# Altium PCB PCB1.pcbdoc (part 2 of 2)
Units mil, origin at the board's own origin, x right, y up, seen from the top; angles counter-clockwise.
Board outline 3910 x 3132 mil, 4 copper layers (Top Layer, Inner1, Inner2, Bottom Layer); 109 components, 89 nets, 472 pads, 360 vias.
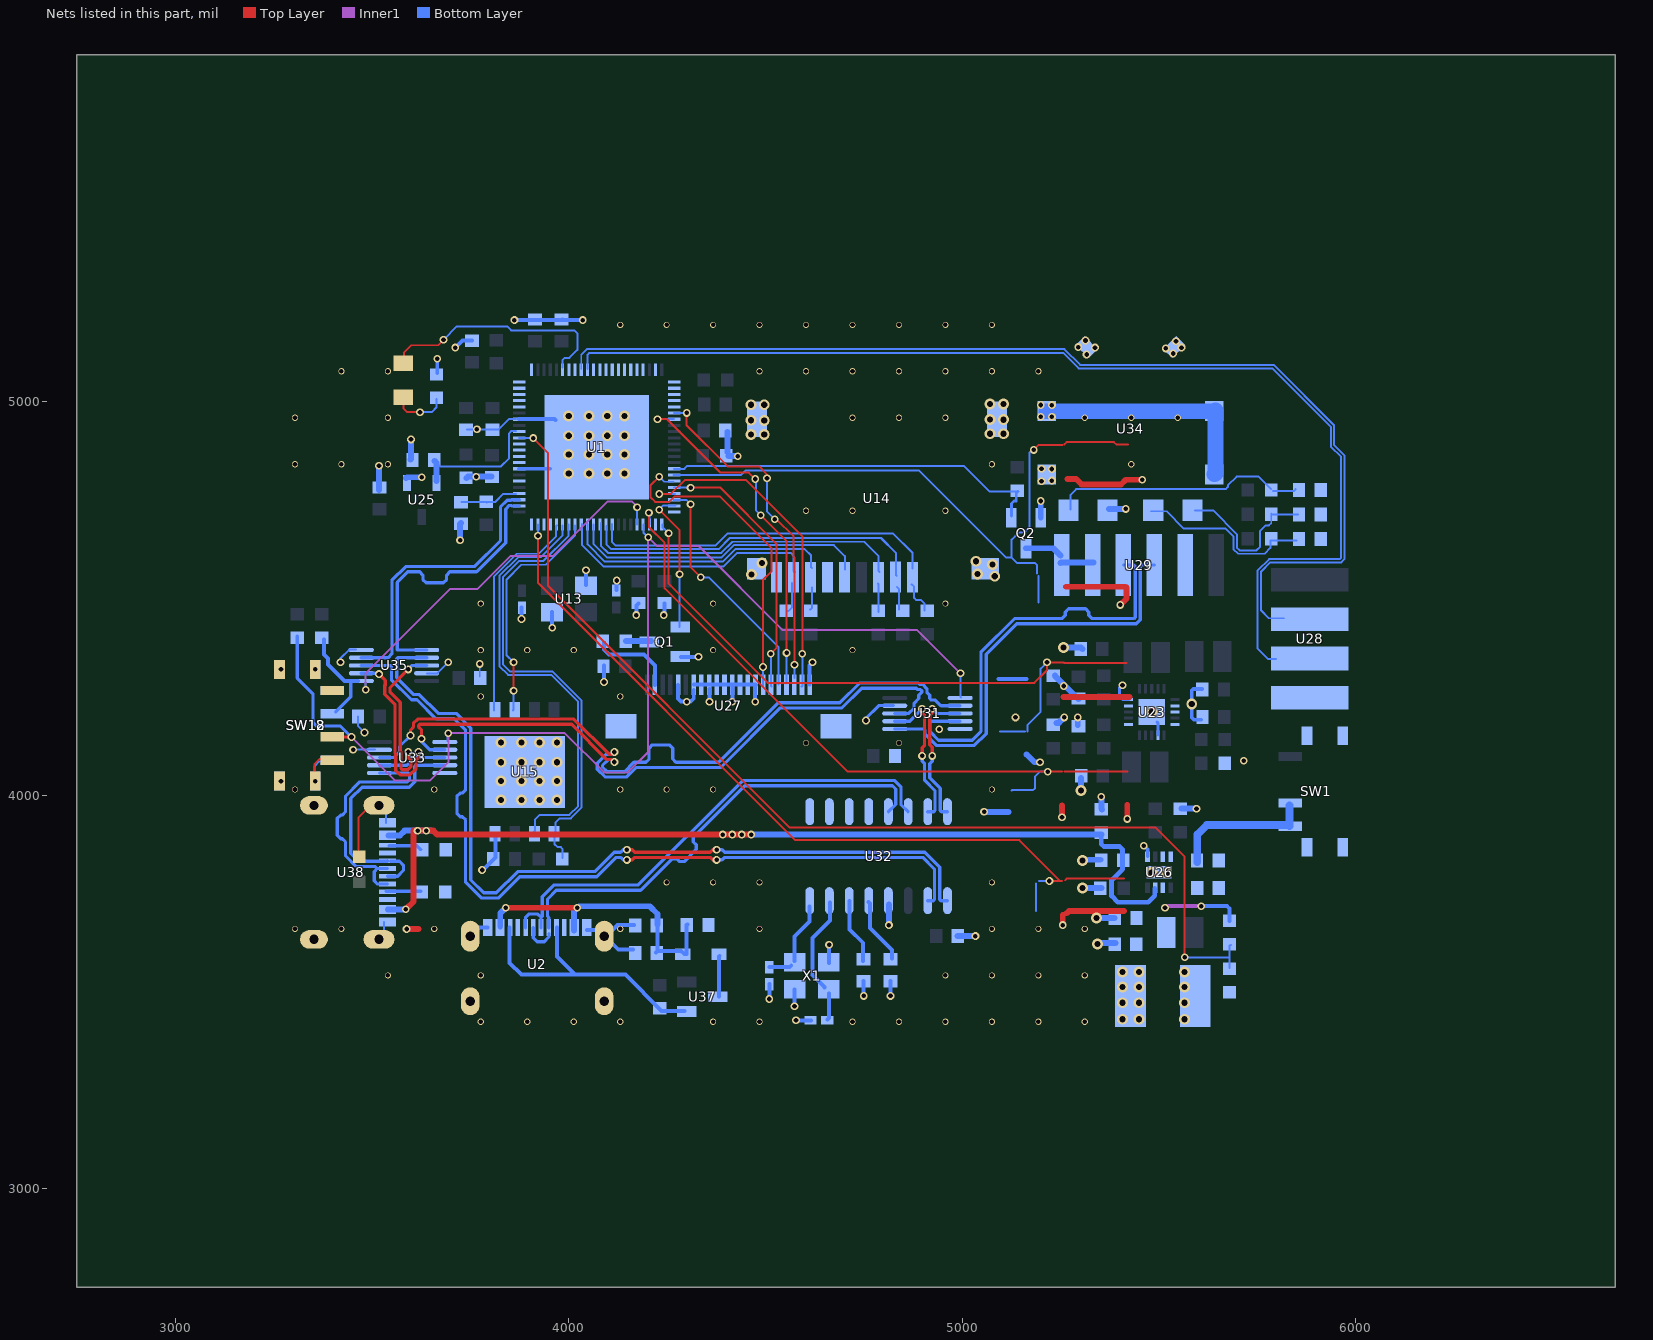
[diagram p4: the nets of this part, all layers, seen from the top]

## Via types
v1: diameter 19.7, hole 11.8, Top Layer to Bottom Layer, 200 vias
v2: diameter 15.67, hole 11.81, Top Layer to Bottom Layer, 82 vias
v3: diameter 27.56, hole 15.75, Top Layer to Bottom Layer, 77 vias
v4: diameter 15.7, hole 11.8, Top Layer to Bottom Layer, 1 vias

## Nets (pads, with @x,y where several pads share a name; then routed paths per layer and width w, separated by ;. In a path a pad name is that pad's centre, name@x,y a point inside that pad or via, vN(x,y) a via of type N, cw(c..) or ccw(c..) an arc to the next point about the centre after c; other vN are vias at no path point) (continued)
$1N24692: Q2.3 U29.1 U29.2 | length 180.3
  Bottom Layer w15: Q2.3@5162,4628 5232,4628 U29.1@5250,4610 ; U29.1@5250,4590 5252,4592 U29.2@5334,4592
$1N27196: R37.2 U27.2 | length 214.6
  Bottom Layer w10: R37.2@4090,4388 4090,4370 4102,4358 4192,4358 4220,4330 U27.2@4220,4280
$1N27198: Q1.3 R37.1 | length 64
  Bottom Layer w15: R37.1@4146,4392 Q1.3@4210,4392
$1N41778: LED3.2 R44.1 | length 143.1
  Top Layer w5: LED3.2@3580,5012 3580,4984 3590,4974 v1(3622,4974)
  Bottom Layer w5: v1(3622,4974) 3652,4974 3664,4986 R44.1@3664,5008
$1N41848: C42.2 C43.2 L4.2 R50.2 U26.6 U30.2 | length 200.1
  Inner1 w10: v1(5516,3714) 5520,3718 v1(5608,3718)
  Bottom Layer w10: v1(5608,3718) 5674,3718 5680,3712 R50.2@5680,3680
  other v3: 5407.8,3430.81 5449.8,3430.81 5407.8,3472.81 5449.8,3472.81 5407.8,3512.81 5449.8,3512.81 5407.8,3550.81 5449.8,3550.81
$1N82039: C57.2 U32.16 X1.3 | length 211.4
  Bottom Layer w10: C57.2@4509.89,3563.16 4561.89,3563.16 X1.3@4565.89,3567.16 ; X1.3@4573.89,3579.16 4573.89,3641.16 4611.89,3679.16 U32.16@4611.89,3717.16
$1N82041: C58.2 U32.15 X1.1 | length 314.3
  Bottom Layer w10: X1.1@4649.89,3511.16 4649.89,3513.16 4619.89,3543.16 4619.89,3637.16 4663.89,3681.16 U32.15@4663.89,3727.16 ; C58.2@4658,3430 4662,3434 X1.1@4662,3496
$1N82056: C59.2 U32.14 | length 166.1
  Bottom Layer w10: U32.14@4713.89,3731.16 4713.89,3659.16 4747.89,3625.16 C59.2@4747.89,3579.16
$1N82057: C60.2 U32.13 | length 168.9
  Bottom Layer w10: U32.13@4761.89,3729.16 4765.89,3725.16 4765.89,3663.16 4821.89,3607.16 C60.2@4821.89,3585.16
$1N82921: D1.2 U37.3 | length 104.8
  Bottom Layer w10: U37.3@4382,3488 4382,3590 D1.2@4384,3592
$1N83812: R62.2 U38.10 | length 84.1
  Bottom Layer w8.3: U38.10@3544,3872 3614,3872 R62.2@3624,3862
$1N83813: R61.2 U38.4 | length 88
  Bottom Layer w8.3: U38.4@3536,3756 R61.2@3624,3756
$1N84485: C45.2 C46.2 SW1.2 SW1.3 U26.3 U26.4 | length 363.9
  Bottom Layer w20: C46.2@5598,3830 5598,3900 5622,3924 SW1.3@5830,3924 ; SW1.3@5832,3922 SW1.2@5832,3974
ADC0: R50.1 R51.2 U1.79 | length 2764.5
  Top Layer w5: v1(3910,4908) 3948,4870 3948,4532 4562,3918 5492,3918 5566,3844 v1(5566,3588)
  Bottom Layer w5: U1.79@3874,4908 v1(3910,4908) ; v1(5566,3588) 5679.8,3588 ; R51.2@5679.8,3560.81 5679.8,3588 ; R50.1@5679.8,3618.81 R50.1@5679.8,3615.8 ; R50.1@5684,3620 R50.1@5679.8,3615.8 ; 5679.8,3588 R50.1@5679.8,3615.8
AVCC_3V0: C1.2 U1.80 U25.2 | length 337.3
  Bottom Layer w5: C1.2@3662,4848 3674,4836 3828,4836 3848,4856 3848,4900 3847.75,4900.25 3847.75,4919.56 3854.19,4926 U1.80@3866,4926
  Bottom Layer w15: C1.2@3659.22,4850.07 3664.06,4845.23 U25.2@3664.06,4798.59
CAM_EN: Q2.1 R56.1 U1.37 | length 977.2
  Bottom Layer w5: U1.37@4268,4830 4294,4830 4301.46,4837.46 5004.54,4837.46 5070,4772 5140,4772 R56.1@5142,4774
  Bottom Layer w7: Q2.1@5126,4710 5126,4742 5132,4748 5138,4748 5138,4768 R56.1@5142,4772
CAM_N: U29.4 U31.6 | length 1071.2
  Bottom Layer w8.3: U31.6@4828.93,4168.63 4902.42,4168.63 4905.35,4165.7 4905.35,4156.04 4934.69,4126.7 5031.51,4126.7 5061.3,4156.49 5061.3,4358.49 5138.81,4436 5442.81,4436 5453.3,4446.49 5453.3,4582.45 5456.23,4585.38 U29.4@5489.14,4585.38
CAM_P: U29.3 U31.4 | length 1070.5
  Bottom Layer w8.3: U31.4@4995.07,4188.31 4921.58,4188.31 4918.65,4185.38 4918.65,4161.55 4940.2,4140 5026,4140 5048,4162 5048,4364 5133.3,4449.3 5254,4449.3 5262.3,4457.6 5262.3,4465.7 5270.6,4474 5314,4474 5322.3,4465.7 5322.3,4457.6 5330.6,4449.3 5437.3,4449.3 5440,4452 5440,4582.45 5437.07,4585.38 U29.3@5410.4,4585.38
EC_A: C69.2 R52.1 U34.A | length 400.2
  Bottom Layer w5: U34.A@5592,4724 5638,4724 5698.5,4663.5 5698.5,4629.52 5705.52,4622.5 5748.5,4622.5 5758,4632 5758,4672 5772,4686 5780,4686 5786,4692 R52.1@5786,4714 ; R52.1@5786,4716 R52.1@5786,4714 ; C69.2@5854,4714 R52.1@5786,4714
EC_B: C68.2 R53.1 U34.B | length 642.3
  Bottom Layer w5: U34.B@5276,4726 5276,4764 5290,4778 5670,4778 5676,4784 5676,4788 5698,4810 5754,4810 R53.1@5786,4778 ; R53.1@5790,4774 5844,4774 C68.2@5848,4778
EC_KEY: C67.2 R54.1 U34.S | length 458.7
  Bottom Layer w5: U34.S@5480,4722 5520,4722 5564,4678 5670,4678 5690,4658 5690,4626 5702,4614 5769.08,4614 5784,4628.92 5784,4648 C67.2@5850,4648
GND: C1.1 C2.1 C9.2 C10.1 C12.1 C13.2 C14.2 C15.2 C20.2 C21.1 C22.2 C32.2 C33.2 C34.2 C35.2 C36.2 C37.2 C38.1 C39.1 C40.2 C42.1 C43.1 C44.1 C45.1 C46.1 C47.1 C48.1 C56.2 C57.1 C58.1 C59.1 C60.1 C61.2 C62.2 C64.2 C65.2 C66.2 C67.1 C68.1 C69.1 C70.1 LED1.1 Q1.2 Q2.2 R2.1 R4.1 R6.1 R24.2 R25.1 R31.2 R32.1 R34.1 R44.2 R51.1 R61.1 R62.1 SW1.4 SW12.3 SW12.4 SW18.1 SW18.4 U1.74 U1.82 U1.89 U2.1 U2.12 U2.13 U2.14 U13.2 U13.4 U14.6 U14.9 U14.10 U14.11 U14.12 U14.13 U15.4 U15.9 U23.1 U23.4 U23.5 U23.12 U23.13 U23.15 U23.17 U23.21 U25.1 U26.1 U26.9 U27.5 U27.7 U27.8 U27.9 U27.10 U27.11 U27.12 U27.13 U27.14 U27.15 U27.22 U27.23 U27.24 U28.1 U30.1 U31.5 U31.9 U32.12 U33.5 U33.9 U34.1 U34.2 U34.3 U34.4 U34.5 U34.6 U34.C U35.5 U35.9 U38.1 U38.12 U38.13 U38.14 X1.2 X1.4 | length 5352.2
  Top Layer w5: SW12.4@3356,4054 3354,4056 3354,4080 3366,4092 SW12.3@3384,4092 ; LED1.1@3466,3844 3466,3944 U38.14@3494,3972 ; v1(3694,4338) v1@3698,4338
  Top Layer w10: v1@4576,3428 v1(4578,3428)
  Top Layer w15: v1(3588,3660) 3618,3660 ; v1(5254,3944) 5254,3974 ; v1(5256,3670) 5256,3696 ; 5258,4250 5426,4250 ; 5264,4530 5416,4530 5418,4528 5418,4500 v1(5402,4484) ; 5266,3700 5272,3706 5412,3706 ; 5268,4804 5290,4804 5304,4790 5404,4790 5416,4802 v1(5458,4802) ; v1(5294,4198) v1@5294,4200 ; v1(5420,3940) 5420,3976
  Bottom Layer w5: SW18.4@3354,4038 3354,4074 3366,4086 SW18.1@3390,4086 ; v1(3420,4338) 3420,4348 3442,4370 U35.5@3460,4370 ; v1(3452,4116) U33.9@3508,4116 ; C61.2@3464,4200 3464,4176.49 v1(3480.97,4159.52) ; U38.1@3530,3678 3530,3646 U38.13@3532,3644 ; U38.14@3530,3970 3536,3964 U38.12@3536,3930 ; U35.9@3640,4310 3666,4310 v1(3694,4338) ; C13.2@3742,4930 3821.75,4930 3847.75,4956 U1.82@3866,4956 ; C62.2@3774,4302 v1(3774,4334)
  Bottom Layer w8: v1(4756,4190) 4756,4196 4788,4228 U31.9@4826,4228 ; v1(5408,4280) 5400,4272 5400,4252 5408,4244 U23.5@5424,4244 ; U23.21@5496,4186 5498,4184 U23.17@5498,4154
  Bottom Layer w10: R44.2@3666,5074 v1(3666,5110) ; v1(3712,5138) 3730,5156 C22.2@3754,5156 ; U2.14@3760,3660 3764,3664 U2.12@3794,3664 ; v1(3780,3810) 3782,3810 3814,3842 U15.4@3814,3900 ; v1(3862,5208) C21.1@3982,5208 ; U1.74@3874,4830 U1.89@3952,4830 ; U1.82@3874,4956 3964,4956 U1.89@3966,4954 ; v1(3880,4448) C9.2@3880,4478 ; v1(3958,4426) U13.2@3958,4466 ; C21.1@3984,5210 C21.1@3982,5208 ; v1(4036,5208) C21.1@3982,5208 ; U13.4@4044,4534 v1(4044,4572) ; U2.1@4046,3658 4088,3658 U2.13@4090,3656 ; v1(4090,4288) C47.1@4090,4330 ; U2.13@4098,3644 4124,3670 C64.2@4166,3670 ; U2.13@4100,3634 4126,3608 C65.2@4164,3608 ; C10.1@4122,4522 v1(4122,4546) ; v1(4172,4458) 4172,4482 C39.1@4178,4488 ; v1(4242,4458) 4244,4460 C38.1@4244,4488 ; U27.5@4278,4280 4278,4246 4286,4238 v1(4300,4238) 4310,4238 4318,4246 U27.7@4318,4268 ; Q1.2@4286,4352 v1(4330,4352) ; U27.7@4318,4282 U27.15@4474,4282 ; v1(4358,4238) U27.9@4358,4270 ; v1(4416,4238) U27.12@4416,4276 ; v1(4474,4238) U27.15@4474,4282 ; U27.15@4476,4280 U27.15@4474,4282 ; v1(4510,3482) C57.1@4510,3520 ; v1(4574,3464) X1.2@4574,3506 ; v1(4578,3428) C58.1@4616,3428 ; U27.22@4612,4282 4612,4330 v1(4620,4338) ; X1.4@4662,3574 v1(4662,3620) ; v1(4750,3490) C59.1@4750,3528 ; v1(4818,3490) C60.1@4818,3528 ; v1(5462,3872) 5472,3862 U26.1@5472,3846 ; C32.2@5608,4192 5590,4192 5584,4198 v3(5584,4232) 5584,4266 5588,4270 C33.2@5610,4270
  Bottom Layer w15: C2.1@3518,4776 v1(3518,4838) ; U25.1@3586,4806 3588.53,4808.53 v1(3626.66,4808.53) ; C1.1@3598,4854 3599.29,4855.29 v1(3599.29,4904.72) ; v1(3724,4648) 3724,4690 C48.1@3726,4692 ; R25.1@3740,4806 3744,4810 C15.2@3804,4810 ; R24.2@4404,4872 C12.1@4404,4924 ; R24.2@4406,4862 v1(4430,4862) ; v1(4814,3670) U32.12@4814,3722 ; C70.1@4988,3642 v1(5034,3642) ; v1(5056,3958) 5118,3958 ; 5164,4104 5184,4084 v1(5198,4084) ; Q2.2@5200,4706 v1(5200,4748) ; R4.1@5236,4304 C34.2@5296,4244 ; R2.1@5240,4184 5246,4184 v1(5260,4198) ; v1(5254,3944) v1@5254,3946 ; v3(5258,4376) 5302,4376 C35.2@5306,4372 ; C37.2@5294,4178 v1(5294,4198) ; v3(5302,4012) C36.2@5302,4044 ; v3(5306,3764) R31.2@5354,3764 ; v3(5306,3834) 5308,3836 C44.1@5352,3836 ; v3(5342,3688) C42.1@5388,3688 ; v3(5344,3622) 5346,3624 C43.1@5390,3624 ; v1(5354,3996) 5354,3966 R32.1@5356,3964 ; U34.C@5374,4728 v1(5416,4728) ; R34.1@5558,3966 v1(5596,3966)
  Bottom Layer w40: U34.2@5214,4976 U34.5@5638,4976 ; U34.6@5642,4816 5644,4818 U34.5@5644,4978
  other v1: 3268.75,4035.28 3355.62,4035.28 5716,4088 4942,4168 5136,4198 5258.31,4277.65 3268.75,4320.72 3355.62,4320.72 5202,4798 5228.39,4799.92 3765.17,4809.86 5202,4830 5228.39,4829.56 3766.68,4930.19 5200,4962 5228.39,4962.1 5200,4992 5228.39,4991.89 5316.65,5120.38 5536.57,5122.88 5518,5136 5338,5138 5558,5138 5295.37,5139.25 5544,5154 5314,5156
  other v2: 3776.61,3424.18 3894.72,3424.18 4012.83,3424.18 4130.94,3424.18 4367.16,3424.18 4485.27,3424.18 4721.49,3424.18 4839.6,3424.18 4957.71,3424.18 5075.82,3424.18 5193.93,3424.18 5312.04,3424.18 3540.39,3542.29 3776.61,3542.29 4957.71,3542.29 5075.82,3542.29 5193.93,3542.29 5312.04,3542.29 3304.17,3660.4 3422.28,3660.4 3658.5,3660.4 4130.94,3660.4 4485.27,3660.4 5075.82,3660.4 5193.93,3660.4 5312.04,3660.4 4249.05,3778.51 4367.16,3778.51 4485.27,3778.51 5075.82,3778.51 3304.17,4014.73 3658.5,4014.73 4130.94,4014.73 4249.05,4014.73 4367.16,4014.73 5075.82,4014.73 4603.38,4132.84 4839.6,4132.84 3776.61,4250.95 4130.94,4250.95 3776.61,4369.06 3894.72,4369.06 4012.83,4369.06 4367.16,4369.06 4721.49,4369.06 3776.61,4487.17 4367.16,4487.17 4957.71,4487.17 4603.38,4723.39 4721.49,4723.39 4957.71,4723.39 3304.17,4841.5 3422.28,4841.5 3540.39,4841.5 5075.82,4841.5 5430.15,4841.5 3304.17,4959.61 3540.39,4959.61 4721.49,4959.61 4839.6,4959.61 4957.71,4959.61 5312.04,4959.61 5430.15,4959.61 5548.26,4959.61 3422.28,5077.72 3540.39,5077.72 4485.27,5077.72 4603.38,5077.72 4721.49,5077.72 4839.6,5077.72 4957.71,5077.72 5075.82,5077.72 5193.93,5077.72 4130.94,5195.83 4249.05,5195.83 4367.16,5195.83 4485.27,5195.83 4603.38,5195.83 4721.49,5195.83 4839.6,5195.83 4957.71,5195.83 5075.82,5195.83
  other v3: 5565.8,3430.81 5565.8,3472.81 5565.8,3512.81 5565.8,3550.81 5482.27,3804.01 5520.43,3804.01 3828,3987.95 3880,3987.95 3926,3987.95 3970,3987.95 3828,4035.95 3880,4035.95 3926,4035.95 3970,4035.95 3828,4083.95 3880,4083.95 3926,4083.95 3970,4083.95 3828,4133.95 3880,4133.95 3926,4133.95 3970,4133.95 5482.3,4211.71 5083.13,4556.87 4465.13,4560.87 5039.13,4562.87 5077.13,4586.87 4491.13,4590.87 5035.13,4594.87 4000,4817.95 4052,4817.95 4098,4817.95 4142,4817.95 4000,4865.95 4052,4865.95 4098,4865.95 4142,4865.95 4000,4913.95 4052,4913.95 4098,4913.95 4142,4913.95 4463.13,4916.87 4497.13,4916.87 5071.13,4918.87 5105.13,4918.87 4463.33,4953.46 4497.13,4952.87 5071.33,4955.46 5105.13,4954.87 4000,4963.95 4052,4963.95 4098,4963.95 4142,4963.95 4463.13,4992.87 4497.13,4992.87 5071.13,4994.87 5105.13,4994.87
KEY0: U1.38 | length 1672.1
  Top Layer w5: v1(5182,4878) 5194,4890 5256,4890 ; 5260,4892 5266,4898 5386,4898 5392,4892 5422,4892
  Bottom Layer w5: U1.38@4266,4814 4438,4814 4450,4826 4890,4826 5112,4604 5126,4604 ; v1(5182,4878) 5178,4878 5172,4872 5172,4682 5158,4668 5144,4668 5126,4650 5126,4604 ; 5190,4564 5190,4586 5186,4590 5140,4590 5126,4604 ; 5194,4490 5194,4558
KEY1: U1.44 | length 72
  Bottom Layer w10: 5092.16,4295.99 5164.16,4295.99
KEY2: U1.45 | length 1719.8
  Top Layer w5: v1(4254,4666) 4254,4538 4506,4286 5184,4286 5216,4318 v1(5216,4338) 5258,4338 5260,4336 5418,4336
  Bottom Layer w5: U1.45@4238,4688 4238,4682 v1(4254,4666) ; 5096,4162 5160,4162 ; 5166,4162 5166,4178 5200,4212 5200,4322 v1(5216,4338)
KEY3: U1.47 | length 1727
  Top Layer w5: v1(4204,4718) 4204,4682 4244,4642 4244,4526 4710,4060 v1(5218,4060) 5254,4060 ; 5260,4060 5420,4060
  Bottom Layer w5: v1(4204,4718) 4206,4716 U1.47@4206,4688 ; 5126,4012 5128,4014 5180,4014 ; 5184,4016 5186,4018 5186,4048 5198,4060 v1(5218,4060)
KEY4: U1.65 | length 2069.6
  Top Layer w5: v1(3922,4660) 3922,4540 4576,3886 5146,3886 5250,3782 ; v1(5222,3782) 5250,3782 ; 5254,3782 5250,3782 ; 5262,3784 5266,3788 5412,3788
  Bottom Layer w5: v1(3922,4660) U1.65@3922,4688 ; 5188,3706 5188,3776 ; 5196,3782 v1(5222,3782)
LCD_CS: U1.42 U27.18 | length 610.1
  Top Layer w5: v1(4310,4740) 4310,4580 v1(4336,4554)
  Bottom Layer w5: U1.42@4267,4751 4299,4751 v1(4310,4740) ; v1(4336,4554) 4356,4554 4534,4376 U27.18@4534,4282
LCD_MOSI: U1.41 U27.21 | length 861.4
  Top Layer w5: v1(4230,4766) 4260,4766 4296,4802 4450.05,4802 4594,4658.05 v1(4594,4360)
  Bottom Layer w5: v1(4230,4766) U1.41@4270,4766 ; U27.21@4592,4276 4594,4278 v1(4594,4360)
LCD_PWM: Q1.1 U1.43 | length 365.1
  Top Layer w5: v1(4230,4726) 4282,4674 v1(4282,4562)
  Bottom Layer w5: v1(4230,4726) 4241,4737 U1.43@4271,4737 ; Q1.1@4282,4428 v1(4282,4562)
LCD_RES: U1.28 U27.20 | length 868.7
  Top Layer w5: v1(4300,4972) 4300,4940 4404,4836 4484,4836 4504,4816 v1(4504,4806) ; v1(4524,4702) 4528,4702 4572,4658 4572,4606 4574,4604 v1(4574,4332)
  Bottom Layer w5: U1.28@4268,4972 v1(4300,4972) ; v1(4504,4806) 4504,4722 v1(4524,4702) ; U27.20@4574,4298 v1(4574,4332)
LCD_RS/CLK: U1.40 U27.17 | length 689.4
  Top Layer w5: v1(4310,4782) 4386,4782 4528,4640 4528,4374 v1(4514,4360)
  Bottom Layer w5: U1.40@4268,4782 v1(4310,4782) ; v1(4514,4360) 4514,4278 U27.17@4516,4276
LCD_TE: U1.29 U27.19 | length 906.9
  Top Layer w5: v1(4226,4956) 4250,4956 4386,4820 4458,4820 v1(4474,4804) ; v1(4488,4712) 4554,4646 v1(4554,4362)
  Bottom Layer w5: v1(4226,4956) U1.29@4268,4956 ; v1(4474,4804) 4476,4802 4476,4724 v1(4488,4712) ; U27.19@4552,4284 4554,4286 v1(4554,4362)
LCD_WR/DC: U1.39 U27.16 | length 836.1
  Top Layer w5: v1(4230,4810) 4208,4788 4208,4758 4220,4746 4256,4746 4270,4760 4384,4760 4516,4628 4516,4570 4494,4548 v1(4494,4326)
  Bottom Layer w5: v1(4230,4810) 4243,4797 U1.39@4267,4797 ; U27.16@4494,4278 v1(4494,4326)
LED0: LED3.1 U1.6 | length 613.6
  Top Layer w5: LED3.1@3582,5096 3582,5126 3600,5144 3668,5144 v1(3682,5158)
  Bottom Layer w5: v1(3682,5158) 3716,5192 3844,5192 3854,5182 4014,5182 4022,5174 4022,5132 4002,5112 3990,5112 3984,5106 U1.6@3984,5088
RESET: C48.2 R12.1 U1.70 | length 149.1
  Bottom Layer w5: C48.2@3728,4746 R12.1@3790,4746 ; R12.1@3792,4744 R12.1@3790,4746 ; U1.70@3866,4766 3834,4766 3814,4746 R12.1@3790,4746
SD_CLK: U1.56 U14.5 | length 761.4
  Bottom Layer w5: U1.56@4063.45,4688.24 4063.45,4638.55 4098,4604 4388,4604 4420,4636 4674,4636 4702,4608 U14.5@4702,4574
SD_CMD: R11.1 U1.55 U14.3 | length 912
  Bottom Layer w5: U1.55@4082,4692 4082,4634 4100,4616 4387.98,4616 4416.48,4644.5 4751.5,4644.5 4788,4608 4788,4570 U14.3@4790,4568 ; U14.3@4786,4538 4788,4536 R11.1@4788,4466
SD_D0: R7.1 U1.57 U14.7 | length 748.6
  Bottom Layer w5: U1.57@4048,4690 4048,4638 4092,4594 4392,4594 4424,4626 4600,4626 4616,4610 4616,4580 U14.7@4618,4578 ; R7.1@4614,4472 4618,4476 U14.7@4618,4528
SD_D1: R8.1 U1.58 U14.8 | length 748.7
  Bottom Layer w5: U1.58@4034,4690 4034,4636 4088,4582 4394,4582 4428,4616 4564,4616 4572,4608 4572,4570 U14.8@4574,4568 ; R8.1@4558,4468 4568,4478 U14.8@4568,4540
SD_D2: R10.1 U1.53 U14.1 | length 974
  Bottom Layer w5: U1.53@4110,4690 4110,4644 4119.5,4634.5 4372.5,4634.5 4404,4666 4824,4666 4874,4616 U14.1@4874,4576 ; U14.1@4872,4536 4878,4530 4878,4502 4884,4496 4896,4496 4904,4488 R10.1@4904,4470
SD_D3: R9.1 U1.54 U14.2 | length 933.6
  Bottom Layer w5: U1.54@4096,4684 4096,4638 4108,4626 4382,4626 4410,4654 4794,4654 4832,4616 4832,4560 U14.2@4834,4558 ; U14.2@4834,4530 4840,4524 R9.1@4840,4472
SEL0HUB_N: U32.9 U35.7 | length 2130.5
  Top Layer w8.3: v1(4148.05,3861.5) 4162.05,3861.5 4168.25,3855.3 4360,3855.3 4366.2,3861.5 v1(4376.05,3861.5)
  Bottom Layer w8.3: U35.7@3639.07,4349.69 3565.58,4349.69 3562.65,4346.76 3562.65,4299.35 3606,4256 3620,4256 3668,4208 3714,4208 3751.3,4170.7 3751.3,3784.7 3784,3752 3816,3752 3870,3806 4066,3806 4115.3,3855.3 4132,3855.3 4138.2,3861.5 v1(4148.05,3861.5) ; v1(4376.05,3861.5) 4390.05,3861.5 4396.25,3855.3 4905.51,3855.3 4943.3,3817.51 4943.3,3735.01 4946.23,3732.07 U32.9@4962.89,3732.07
SEL0HUB_P: U32.10 U35.3 | length 2132.9
  Top Layer w8.3: v1(4148.05,3835.8) 4162.05,3835.8 4168.25,3842 4360,3842 4366.2,3835.8 v1(4376.05,3835.8)
  Bottom Layer w8.3: U35.3@3472.93,4330 3546.42,4330 3549.35,4327.07 3549.35,4293.84 3600.49,4242.7 3614.49,4242.7 3662.49,4194.7 3708.49,4194.7 3738,4165.19 3738,4014 3729.7,4005.7 3724.3,4005.7 3716,3997.4 3716,3954 3724.3,3945.7 3729.7,3945.7 3738,3937.4 3738,3779.19 3778.49,3738.7 3821.51,3738.7 3875.51,3792.7 4071.51,3792.7 4120.81,3842 4132,3842 4138.2,3835.8 v1(4148.05,3835.8) ; v1(4376.05,3835.8) 4390.05,3835.8 4396.25,3842 4900,3842 4930,3812 4930,3735.01 4927.07,3732.07 U32.10@4912.89,3732.07
SEL0SEL1_N: U33.7 U35.8 | length 513.2
  Top Layer w8.3: v1(3592,4320) 3546,4274 3546,4262 3572,4236 3572,4112 3574,4110 3574,4068 3576.93,4065.07 3591.07,4065.07 3598.7,4072.7 3598.7,4089.75 3592.5,4095.95 v1(3592.5,4109.95)
  Bottom Layer w8.3: U33.7@3518.93,4076.31 3589.08,4076.31 3598.92,4086.16 3598.92,4095.06 3592.94,4101.04 3592.94,4109.34 v1(3592.5,4109.95) ; v1(3592,4320) 3602,4330 U35.8@3639.07,4330
SEL0SEL1_P: U33.3 U35.2 | length 506.3
  Top Layer w8.3: v1(3518,4308) 3534,4292 3534,4279.73 3532.7,4279.51 3532.7,4256.49 3558.7,4230.49 3558.7,4106.49 3560.7,4104.49 3560.7,4062.49 3571.43,4051.77 3596.57,4051.77 3612,4067.19 3612,4089.75 3618.2,4095.95 v1(3618.2,4109.95)
  Bottom Layer w8.3: U35.2@3472.93,4310.32 3515.68,4310.32 v1(3518,4308) ; v1(3618.2,4109.95) 3618.2,4101.04 3613.16,4096 U33.3@3685.07,4096
SEL2HUB_N: U31.7 U32.7 | length 379.8
  Top Layer w8.3: v1(4898.5,4100.05) 4898.5,4120.5 4904.7,4126.7 4904.7,4204 4898.5,4210.2 v1(4898.5,4220.05)
  Bottom Layer w8.3: U31.7@4828.93,4188.31 4866.76,4188.31 v1(4898.5,4220.05) ; v1(4898.5,4100.05) 4898.5,4086.05 4904.7,4079.85 4904.7,4038.49 4931.24,4011.95 4931.24,3961.19 4928.31,3958.25 U32.7@4912.89,3958.25
SEL2HUB_P: U31.3 U32.8 | length 373
  Top Layer w8.3: v1(4924.2,4100.05) 4924.2,4121.8 4918,4128 4918,4204 4924.2,4210.2 v1(4924.2,4220.05)
  Bottom Layer w8.3: v1(4924.2,4100.05) 4924.2,4086.05 4918,4079.85 4918,4044 4944.54,4017.46 4944.54,3961.19 4947.47,3958.25 U32.8@4962.89,3958.25 ; v1(4924.2,4220.05) 4936.25,4208 U31.3@4995.07,4208
SEL2SEL1_N: U31.8 U33.8 | length 1805.4
  Top Layer w8.3: v1(3598,4152) 3598,4166 3605.35,4173.35 3605.35,4183.01 3616.08,4193.73 4013.07,4193.73 4102.81,4104 4110,4104 v1(4116.2,4110.2)
  Bottom Layer w8.3: U33.8@3518.93,4096 3554.97,4096 3570,4111.03 3570,4124 v1(3598,4152) ; v1(4116.2,4110.2) 4110,4104 4095.19,4104 4072.7,4081.51 4072.7,4066.34 4092.34,4046.7 4147.51,4046.7 4171.4,4070.6 4386.6,4070.6 4538,4222 4694.81,4222 4744.81,4272 4884,4272 4887.27,4268.73 4894.42,4268.73 4897.35,4265.8 4897.35,4261.65 4890,4254.3 4890,4246 4878,4234 4878,4221.03 4864.97,4208 U31.8@4828.93,4208
SEL2SEL1_P: U31.2 U33.2 | length 1804
  Top Layer w8.3: v1(3626,4144) 3626,4166 3618.65,4173.35 3618.65,4177.5 3621.58,4180.43 4007.57,4180.43 4097.3,4090.7 4110,4090.7 v1(4116.2,4084.5)
  Bottom Layer w8.3: v1(3626,4144) 3626,4136 3646.32,4115.68 U33.2@3685.07,4115.68 ; v1(4116.2,4084.5) 4110,4090.7 4100.7,4090.7 4086,4076 4086,4071.85 4097.85,4060 4142,4060 4165.9,4083.9 4196,4083.9 4204.3,4092.2 4204.3,4119.7 4212.6,4128 4256,4128 4264.3,4119.7 4264.3,4092.2 4272.6,4083.9 4381.09,4083.9 4532.49,4235.3 4689.3,4235.3 4739.3,4285.3 4889.51,4285.3 4892.77,4282.03 4899.92,4282.03 4910.65,4271.31 4910.65,4261.65 4918,4254.3 4918,4246 4922,4242 4932,4242 4946.32,4227.68 U31.2@4995.07,4227.68
SPI0_CLK: U1.59 U15.6 | length 586.7
  Top Layer w5: v1(3860,4266) v1(3860,4338)
  Bottom Layer w5: U15.6@3858,4216 3860,4218 v1(3860,4266) ; v1(3860,4338) 3842,4356 3842,4548 3880,4586 3942,4586 4016,4660 U1.59@4016,4686
SPI0_CS: R22.1 U1.60 U15.1 | length 1150.7
  Bottom Layer w5: U15.1@3964,3902 3964,3876 3972,3868 3980,3868 3984,3864 R22.1@3984,3840 ; U15.1@3966,3908 3966,3930 3977.5,3941.5 4005.52,3941.5 4032.5,3968.48 4032.5,4241.52 3959.52,4314.5 3851.5,4314.5 3832.5,4333.5 3832.5,4554.46 3874.04,4596 3936,4596 4000,4660 U1.60@4000,4688
SPI0_MISO: U1.61 U15.2 | length 1116.4
  Bottom Layer w5: U15.2@3912,3908 3914,3910 3914,3938 3926,3950 4002,3950 4024,3972 4024,4238 3956,4306 3846,4306 3824,4328 3824,4557.98 3871.52,4605.5 3929.5,4605.5 3984,4660 U1.61@3984,4686
SPI0_MOSI: U1.62 U15.5 | length 569.1
  Bottom Layer w5: U15.5@3810,4216 3810,4556 3868,4614 3924,4614 3968,4658 3968,4684 U1.62@3970,4686
TYPEC_CC: R57.2 U2.4 U2.10 U37.1 | length 723.6
  Bottom Layer w10: U2.10@3850,3664 3850,3574 3880,3544 4016,3544 ; U2.4@3970,3664 3970,3590 4016,3544 ; U37.1@4294,3452 4236,3452 4144,3544 4016,3544
U_N: U1.68 U35.6 | length 725.5
  Bottom Layer w8.3: U35.6@3639.07,4369.37 3564,4369.37 3564,4541.19 3590.81,4568 3621.29,4568 3629.59,4559.7 3629.59,4548.3 3637.89,4540 3681.29,4540 3689.59,4548.3 3689.59,4559.7 3697.89,4568 3766,4568 3840,4642 3840,4727.51 3849.2,4736.71 3853.35,4736.71 3854.57,4735.48 U1.68@3874.47,4735.48
U_P: U1.69 U35.4 | length 727.6
  Bottom Layer w8.3: U35.4@3472.93,4349.69 3540.86,4349.69 3550.7,4359.53 3550.7,4546.7 3585.3,4581.3 3760.49,4581.3 3826.7,4647.51 3826.7,4733.02 3843.69,4750.01 3853.35,4750.01 3854.57,4751.23 U1.69@3874.47,4751.23
UART1_RX: U1.9 U28.3 | length 2776.5
  Bottom Layer w5: U1.9@4032,5084 4032,5120 4046,5134 5260,5134 5300,5094 5792,5094 5946,4940 5946,4890 5972,4864 5972,4600 5964,4592 5784,4592 5760,4568 5760,4470 5780,4450 U28.3@5818,4450
UART1_TX: U1.10 U28.2 | length 2830.3
  Bottom Layer w5: U1.10@4048,5084 4048,5120 4052,5124 5257.98,5124 5296.48,5085.5 5788.48,5085.5 5937.5,4936.48 5937.5,4886.48 5963.5,4860.48 5963.5,4603.52 5960.48,4600.5 5780.48,4600.5 5751.5,4571.52 5751.5,4372.5 5778,4346 U28.2@5798,4346
USB_DEV_N: U33.6 U38.5 U38.7 | length 636.4
  Bottom Layer w8.3: U33.6@3518.93,4056.63 3592.42,4056.63 3595.35,4053.7 3595.35,4040 3589.35,4034 3469.19,4034 3432.7,3997.51 3432.7,3958 3424.4,3949.7 3420.3,3949.7 3412,3941.4 3412,3898 3420.3,3889.7 3424.4,3889.7 3432.7,3881.4 3432.7,3846.49 3460.49,3818.7 3508.85,3818.7 3513.7,3813.84 ; U38.5@3539.51,3774.47 3513.7,3774.47 3506,3782.18 3506,3806.14 3513.7,3813.84 ; U38.7@3539.51,3813.84 3513.7,3813.84
USB_DEV_P: U33.4 U38.6 U38.8 | length 635.6
  Bottom Layer w8.3: U38.6@3539.51,3794.16 3565.31,3794.16 3580,3808.85 3580,3822 3570,3832 U38.8@3548,3832 ; U38.8@3539.51,3833.53 3539.51,3832.63 3538.87,3832 3466,3832 3446,3852 3446,3992 3474.7,4020.7 3594.86,4020.7 3608.65,4034.49 3608.65,4073.38 3611.58,4076.31 U33.4@3685.07,4076.31
USB_N: U2.5 U2.7 U32.5 | length 1263.8
  Bottom Layer w8.3: U2.7@3910.16,3663.51 3910.16,3637.7 3919.86,3628 3938,3628 3950,3640 U2.5@3950,3648 ; U2.5@3949.53,3663.51 3949.53,3689.31 3946.34,3692.5 3946.34,3736.34 3968.7,3758.7 4182.7,3758.7 4262.84,3838.84 4274.57,3838.84 4281.84,3831.57 4293.57,3831.57 4324.26,3862.26 4324.26,3874 4317,3881.26 4317,3893 4448,4024 4823.24,4024 4831.24,4016 4831.24,3976.6 U32.5@4812.89,3958.25
USB_P: U2.6 U2.8 U32.6 | length 1264
  Bottom Layer w8.3: U2.8@3890.47,3663.51 3890.47,3690.47 3898,3698 3921.15,3698 3929.84,3689.31 ; U2.6@3929.84,3663.51 3929.84,3689.31 ; U32.6@4862.89,3958.25 4844.54,3976.6 4844.54,4021.51 4828.75,4037.3 4442.49,4037.3 4177.19,3772 3963.19,3772 3933.03,3741.84 3933.03,3692.5 3929.84,3689.31
USB_SEL0: R55.2 SW18.2 U1.49 U35.1 | length 1239.1
  Inner1 w5: v1(3484,4268) 3484,4310 3698,4524 3768,4524 3852,4608 3960,4608 4098.35,4746.35 4161.65,4746.35 4174,4734 v1(4174,4732)
  Bottom Layer w5: v1(3484,4268) U35.1@3484,4288 ; U1.49@4174,4688 v1(4174,4732)
  Bottom Layer w8.3: SW18.2@3408,4212 3446,4250 U35.1@3446,4290
  Bottom Layer w10: R55.2@3378,4396 3378,4358 3388,4348 3388,4332 3430,4290 3446,4290 U35.1@3464,4290
USB_SEL12: R60.2 SW12.2 U1.48 U31.1 U33.1 | length 2945.8
  Top Layer w8.3: SW12.2@3410,4148 v1(3448,4148)
  Inner1 w5: v1(3448,4148) 3558,4038 3648,4038 3694,4084 v1(3694,4158) 3990,4158 4090,4058 4150,4058 4202,4110 v1(4202,4656) 4224,4634 4330,4634 4544,4420 4886,4420 v1(4996,4310)
  Bottom Layer w5: U33.1@3692,4138 3692,4156 v1(3694,4158) ; U1.48@4190,4688 4190,4668 v1(4202,4656) ; v1(4996,4310) 4996,4250 U31.1@4998,4248
  Bottom Layer w8.3: R60.2@3310,4404 3310,4298 3350,4258 3350,4186 3360,4176 3420,4176 v1(3448,4148)
VBUS: C44.2 R32.2 U26.7 U38.2 U38.11 | length 2475.6
  Top Layer w15: v1(3586,3710) 3606,3730 3606,3910 v1(3616,3910) v1(3638,3910) 3656,3910 3666,3900 v1(4392,3900) v1(4416,3900) v1(4440,3900) v1(4464,3900)
  Bottom Layer w12: R32.2@5354,3900 5354,3876 5360,3870 5400,3870 5408,3862 5408,3812 5380,3784 5380,3744 5396,3728 5473.19,3728 5490,3744.81 U26.7@5490,3764
  Bottom Layer w15: U38.2@3540,3710 v1(3586,3710) ; U38.11@3542,3898 3571.15,3898 3583.15,3910 v1(3616,3910) v1(3638,3910) 3650,3910 ; v1(4464,3900) R32.2@5354,3900
VHOST: C64.1 C65.1 C66.1 D1.1 U2.2 U2.11 | length 758.9
  Top Layer w15: v1(3840,3714) v1(4022,3714)
  Bottom Layer w10: C65.1@4222,3600 C65.1@4226,3604 ; C64.1@4226,3672 C65.1@4226,3604 ; D1.1@4294,3596 4286,3604 C65.1@4226,3604 ; D1.1@4300,3596 4300,3670 C66.1@4302,3672
  Bottom Layer w15: U2.11@3826,3666 3826,3700 v1(3840,3714) ; U2.2@4014,3656 4014,3706 v1(4022,3714) 4026,3718 4206,3718 4226,3698 C64.1@4226,3672
"": SW12.1 SW18.3 U1.1 U1.7 U1.8 U1.11 U1.12 U1.13 U1.14 U1.15 U1.16 U1.17 U1.18 U1.19 U1.21 U1.23 U1.24 U1.25 U1.26 U1.27 U1.46 U1.63 U1.64 U1.66 U1.72 U1.75 U1.76 U1.77 U1.78 U1.84 U1.85 U1.86 U1.87 U1.88 U2.3 U2.9 U29.5 U32.1 U32.2 U32.3 U32.4 U38.3 U38.9

## Polygon pours and split planes (outlines as drawn)
2V5 on Inner2 (solid, remove dead copper, pour order 9): 5633.77,4305.93 5692.83,4305.93 5692.83,4392.61 5633.77,4392.61
1V2 on Inner2 (solid, remove dead copper, pour order 10): 5404.3,4031.94 5454.52,4031.94 5454.52,4111.71 5404.3,4111.71
GND on Top Layer (solid, remove dead copper, pour order 12): 3118,3264 6120,3264 6120,5388 3118,5388
3V3 on Inner1 (solid, remove dead copper, pour order 13): 3090,3240 6144,3240 6144,5412 3090,5412
GND on Inner2 (solid, remove dead copper, pour order 14): 3048,3190 6190,3190 6190,5462 3048,5462
GND on Bottom Layer (solid, remove dead copper, pour order 15): 3000,3146 6242,3146 6242,5516 3000,5516
$1N10396 on Bottom Layer (solid, remove dead copper, pour order 0): 5529.54,4239.27 5561.17,4239.27 5561.17,4273.16 5601.72,4313.71 5614.3,4313.71 5614.3,4392.61 5564.93,4392.61 5564.93,4330.52 5529.54,4295.13
2V5 on Bottom Layer (solid, remove dead copper, pour order 1): 5692.83,4115.71 5638.3,4115.71 5638.3,4392.61 5692.86,4392.61 5692.83,4390.66
$1N10472 on Bottom Layer (solid, remove dead copper, pour order 2): 5446.86,4258.95 5446.86,4292.54 5469.12,4314.8 5469.12,4389.54 5529.64,4389.54 5529.64,4311.71 5518.89,4300.96 5469.54,4300.96 5454.73,4286.15 5454.73,4258.95 5446.86,4258.95
3V3 on Bottom Layer (solid, remove dead copper, pour order 3): 5401.39,4310.8 5378.3,4287.71 5278.3,4287.71 5278.3,4317.71 5334.29,4317.71 5334.29,4388.05 5459.43,4388.05 5459.43,4310.8
1V2 on Bottom Layer (solid, remove dead copper, pour order 4): 5454.3,4031.71 5342.3,4031.71 5342.3,4103.71 5278.3,4103.71 5278.3,4135.66 5385.59,4135.66 5410.17,4111.08 5454.52,4111.08 5454.52,4031.94
$1N10463 on Bottom Layer (solid, remove dead copper, pour order 5): 5526.3,4031.71 5526.3,4111.71 5483.65,4111.71 5456.3,4139.06 5456.3,4165.71 5445.12,4165.71 5445.12,4128.89 5466.3,4107.71 5466.3,4039.71 5474.3,4031.71
$1N41848 on Bottom Layer (solid, remove dead copper, pour order 6): 5547.8,3702.9 5547.8,3590.81 5481.8,3590.81 5469.8,3578.81 5469.8,3410.68 5387.8,3410.68 5387.8,3568.81 5415.14,3568.81 5415.14,3702.81 5541.8,3702.81
$1N22126 on Bottom Layer (solid, remove dead copper, pour order 7): 5613.8,3690.81 5609.87,3690.81 5537.82,3762.85 5537.82,3778.78 5537.8,3778.81 5525.14,3778.81 5525.14,3752.21 5566.66,3703.95 5566.66,3612.08 5613.56,3612.08
$1N41848 on Bottom Layer (solid, remove dead copper, pour order 8): 5517.8,3778.81 5517.8,3730.81 5545.7,3702.9 5547.8,3702.9 5547.8,3692.82 5496.26,3692.82 5496.26,3715.27 5503.8,3722.81 5503.8,3776.81 5505.8,3778.81
$1N84485 on Bottom Layer (solid, remove dead copper, pour order 11): 5504,3858 5613.77,3858 5616,3855.77 5616,3744 5614,3742 5578,3742 5576,3744 5576,3812 5559.5,3828.5 5505.5,3828.5 5504,3830

## Keep-outs
Board Outline Layer:
  lines w10 net "": 4920.69,3369.11 5639.5,3369.11 ; 4920.69,3369.35 3592.26,3369.35 cw(c3592.26,3723.68) 3237.93,3723.68 3237.93,4826.05 cw(c3592.26,4826.05) 3592.26,5180.38 ccw(c3592.08,5338.9) 3724,5251 5086.2,5251 ccw(c5174.55,5248.47) 5118.84,5179.87 5639.5,5180.38 cw(c5639.5,4826.05) 5993.83,4826.05 5993.86,3723.71 cw(c5639.5,3723.71) 5639.5,3369.36
Multi-Layer:
  region net "": 3503.69,4910.79 ccw(c3454.47,4910.62) 3405.26,4910.79 ccw(c3454.47,4910.96)
  region net "": 5865.88,4904.79 ccw(c5816.66,4904.79) 5767.45,4904.79 ccw(c5816.66,4904.79)
  region net "": 3680.84,3526.84 ccw(c3631.63,3526.54) 3582.42,3526.84 ccw(c3631.63,3527.14)
  region net "": 5865.88,3644.95 ccw(c5816.66,3644.95) 5767.45,3644.95 ccw(c5816.66,3644.95)

## Other copper
Top Layer:
  text "↑-on" at 5810.32,4190.46 h89.2
  text "↑↑-Cam /  ↑↓-uCam /  ↓x-uDisk" at 3261.22,3757.42 h45.19
  text "dev" at 3366.1,3508.46 h89.2
  text "host" at 3553.84,3390.56 h89.2

## Silkscreen, mask and mechanical layers (free items; w line width, h text height)
Top Silkscreen Layer:
  region net "": 4672,4463.15 4868.85,4463.15 4868.85,4660 4672,4660
Bottom Silkscreen Layer:
  text "V" at 5772.59,4504.94 h78.45
  text "+      N  P   -   -" at 5666.74,4436.34 h66.9
  text "R" at 5768.59,4406.94 h78.45
  text "T" at 5772.59,4300.94 h78.45
  text "-" at 5706.59,4284.23 h78.45 r180
  text "JLCJLCJLCJLC" at 4160.56,4114.52 h51.1 r180
  text "bat+" at 5362.49,3439.08 h135.94
Top Solder Mask Layer:
  region net "": 3274,4349.27 3704,4349.27 3704,4792 3274,4792
  region net "": 5596,3000 6410,3000 6410,5632 5596,5632
  region net "": 3364,3508 3506,3508 3506,3580 3364,3580
  region net "": 3556,3392 3718,3392 3718,3462 3556,3462
  region net "": 3256,3740 3434,3740 3434,3896 3256,3896
Mechanical Layer:
  circle w1 net "": c3454.47,4910.79 r49.21
  circle w1 net "": c5816.67,4904.79 r49.21
  circle w1 net "": c3631.63,3526.84 r49.21
  circle w1 net "": c5816.67,3644.95 r49.21